# Altium PCB PCB_ATMEGA.PcbDoc
Units mil, origin at the board's own origin, x right, y up, seen from the top; angles counter-clockwise.
Board outline 3993.11 x 2102.36 mil, 2 copper layers (Top Layer, Bottom Layer), stack 87.008 mil thick; 71 components, 111 nets, 369 pads, 51 vias.
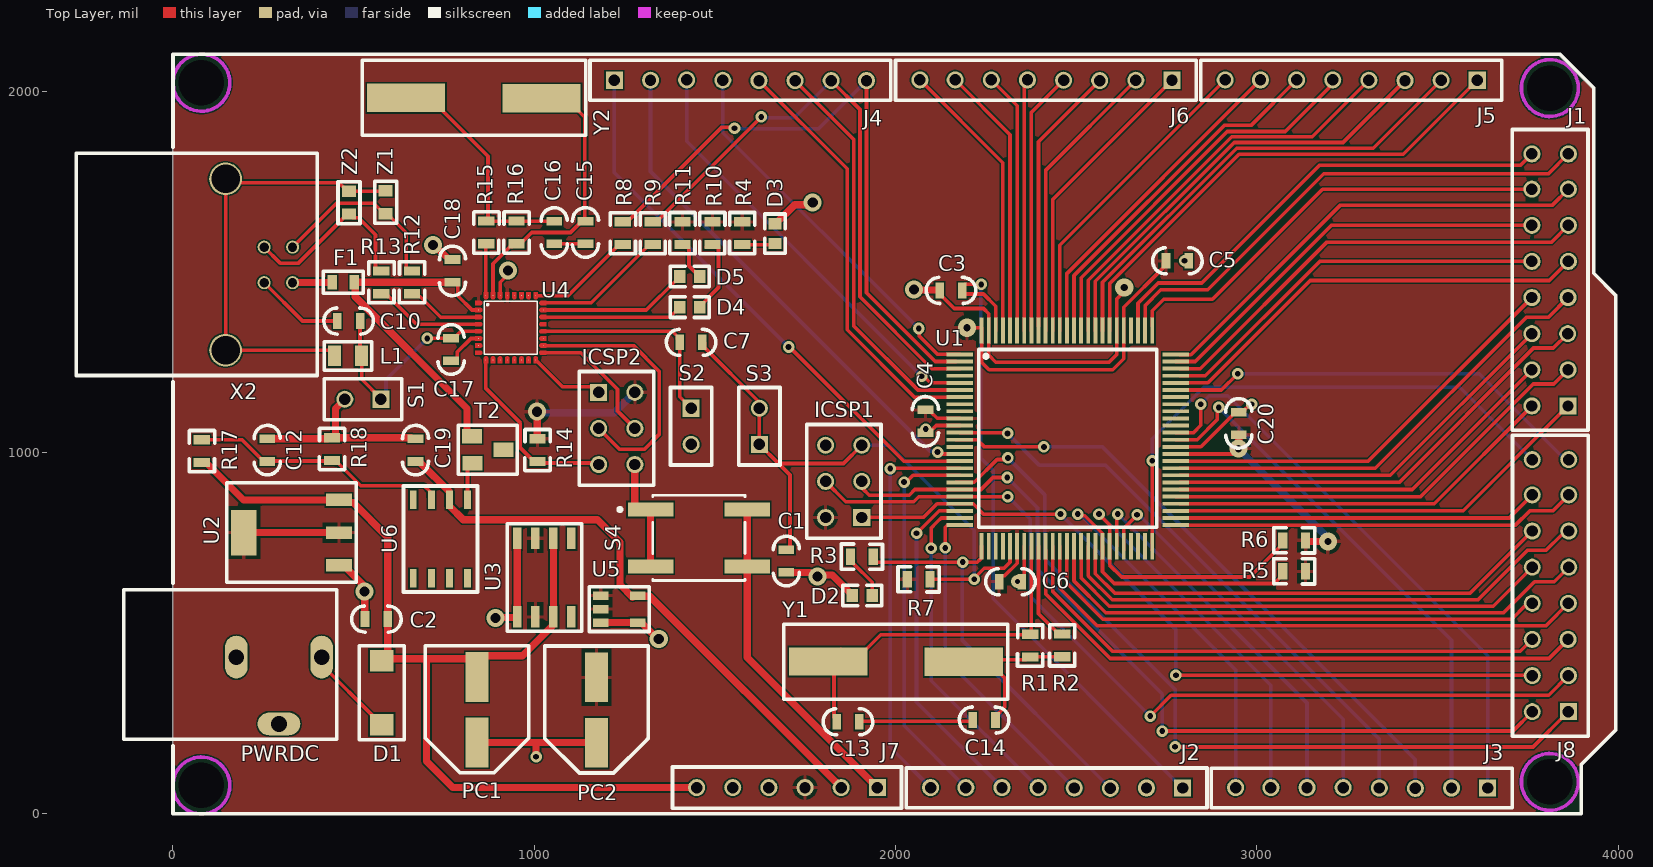
[diagram p0: Top Layer view]
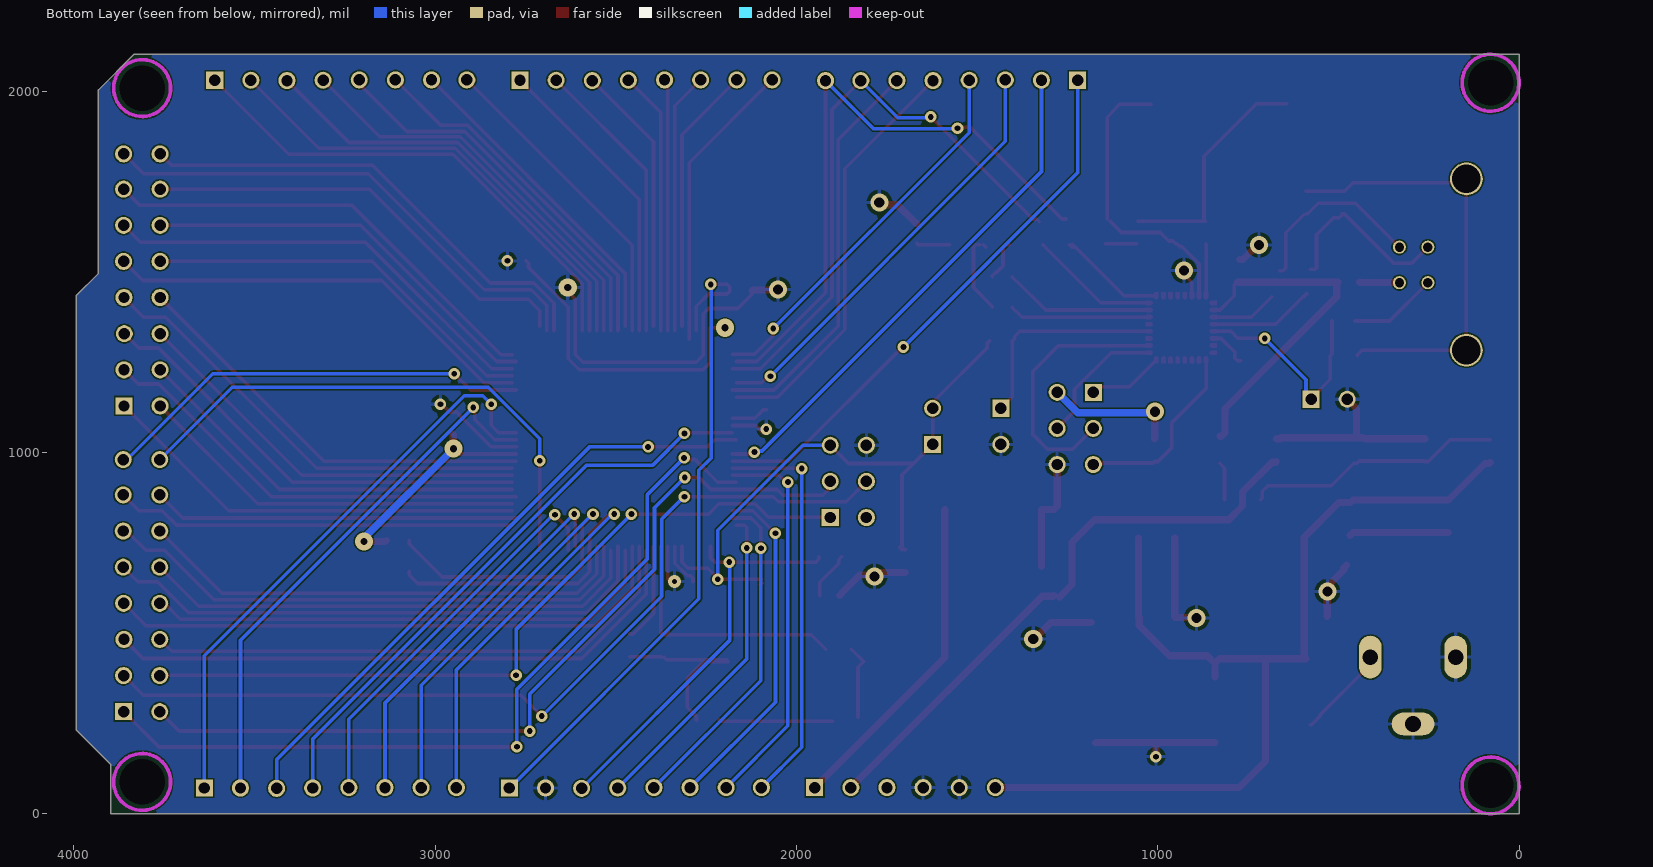
[diagram p1: Bottom Layer view, seen from below]

## Layer stack, top to bottom
Top Solder: solder mask 3.937, Solder Resist, Dk 3.5
Top Layer: signal copper 13.7795
Dielectric 1: dielectric 59.4488, FR-4, Dk 4.8
Bottom Layer: signal copper 13.7795
Bottom Solder: solder mask 3.937, Solder Resist, Dk 3.5

## Board outline
0,0 0,2102.36 3833.66,2102.36 3932.09,2003.94 3932.09,1496.06 3993.11,1435.04 3993.11,232.28 3897.64,136.81 3897.64,0

## Design rules (kind name [scope] priority, off if disabled: settings)
Clearance Clearance_1 [All] p1: gap=3.94 ignorepadtopadclearanceinfootprint=TRUE
Clearance [All] p2 off: gap=10 ignorepadtopadclearanceinfootprint=FALSE
ComponentClearance ComponentClearance_1 [All] p1: gap=10 collisioncheckmode=3 verticalgap=10 showdistances=FALSE
ComponentClearance [All] p2 off: gap=7.87 collisioncheckmode=3 verticalgap=7.87 showdistances=FALSE
HoleSize HoleSize_1 [All] p1: absolutevalues=TRUE maxlimit=157.48 minlimit=1 maxpercent=80.000 minpercent=20.000
HoleSize [All] p2 off: absolutevalues=TRUE maxlimit=100 minlimit=1 maxpercent=80.000 minpercent=20.000
HoleToHoleClearance HoleToHoleClearance_1 [All] p1: gap=7.87 allowstackedmicrovias=TRUE
HoleToHoleClearance [All] p2 off: gap=10 allowstackedmicrovias=TRUE
MinimumSolderMaskSliver MinimumSolderMaskSliver_1 [All] p1: minsoldermaskwidth=3.94
MinimumSolderMaskSliver [All] p2 off: minsoldermaskwidth=10
PolygonConnect [All] p1: connectstyle=Relief reliefconductorwidth=10 reliefentries=4 polygonreliefangle="90 Angle" airgapwidth=10
RoutingVias RoutingVias_1 [All] p1: holewidth=28 width=50 viastyle="Through Hole" minholewidth=16 minwidth=32 maxholewidth=28 maxwidth=50
RoutingVias [All] p2 off: holewidth=16 width=32 viastyle="Through Hole" minholewidth=16 minwidth=32 maxholewidth=16 maxwidth=32
SilkToSilkClearance SilkToSilkClearance_1 [All] p1: silktosilkclearance=7.87
SilkToSilkClearance [All] p2 off: silktosilkclearance=10
SilkToSolderMaskClearance SilkToSolderMaskClearance_1 [IsPad] p1: minsilkscreentomaskgap=3.94 clearancetoexposedcopper=TRUE
SilkToSolderMaskClearance [IsPad] p2 off: minsilkscreentomaskgap=10 clearancetoexposedcopper=TRUE
SolderMaskExpansion SolderMaskExpansion_1 [All] p1: expansion=1.57 istentingtop=FALSE
SolderMaskExpansion [All] p2 off: expansion=4 istentingtop=FALSE
SupplyNets "Schematic Supply Nets_4" [InNet('GND')] p1: voltage=0.000
SupplyNets "Schematic Supply Nets_3" [InNet('+5V')] p2: voltage=0.000
SupplyNets "Schematic Supply Nets_2" [InNet('VIN')] p3: voltage=0.000
SupplyNets "Schematic Supply Nets_1" [InNet('USBVCC')] p4: voltage=0.000
SupplyNets "Schematic Supply Nets" [InNet('+3.3V')] p5: voltage=0.000
Width [All] p1: maxlimit=30 minlimit=10 preferedwidth=20 minimp=50.000000 maximp=50.000000 favimp=50.000000
24 further rules are at their usual default settings.

## Classes and differential pairs
component class SCH2: C7 C10 C12 C15 C16 C17 C18 C19 D4 D5 F1 ICSP2 L1 R8 R9 R10 R11 R12 R13 R14 R15 R16 R17 R18 S1 S2 S3 T2 U4 U5 U6 X2 Y2 Z1 Z2
component class SCH1: C1 C2 C3 C4 C5 C6 C13 C14 C20 D1 D2 D3 ICSP1 J1 J2 J3 J4 J5 J6 J7 J8 PC1 PC2 PWRDC R1 R2 R3 R4 R5 R6 R7 S4 U1 U2 U3 Y1

## Components (designator, comment, footprint, x,y, rotation, side; value= is the part's Value field where it differs from the comment)
C1 "uF" CAPACITOR 1697.83,699.8 r90 top
C2 "uF" CAPACITOR 562.99,539.37 r0 top
C3 "100nF" CAPACITOR 2153.54,1448.82 r0 top
C4 "100nF" CAPACITOR 2082.68,1086.61 r90 top
C5 "100nF" CAPACITOR 2780,1530.83 r180 top
C6 "100nF" CAPACITOR 2317.91,642.72 r180 top
C7 "uF" CAPACITOR 1434.05,1305.12 r0 top
C10 "uF" CAPACITOR 486.22,1364.17 r0 top
C12 "uF" CAPACITOR 260.83,1006.89 r270 top
C13 "100nF" CAPACITOR 1868.11,254.92 r180 top
C14 "100nF" CAPACITOR 2245.08,259.84 r0 top
C15 "uF" CAPACITOR 1141.73,1609.25 r90 top
C16 "uF" CAPACITOR 1055.12,1609.25 r90 top
C17 "uF" CAPACITOR 769.68,1285.43 r270 top
C18 "uF" CAPACITOR 773.62,1502.95 r90 top
C19 "uF" CAPACITOR 671.26,1006.89 r270 top
C20 "100nF" CAPACITOR 2950,1080.83 r270 top
D1 "M7" "DIODE M7" 577.76,335.63 r90 top
D2 "C" LED 1907.48,604.33 r180 top
D3 "C" LED 1666.34,1606.3 r90 top
D4 "C" LED 1430.12,1402.56 r180 top
D5 "C" LED 1430.12,1487.2 r180 top
F1 "K" FUSE 471.46,1471.46 r0 top
ICSP1 "ICSP" ICSP 1856.3,920.28 r90 top
ICSP2 "ICSP2" ICSP 1228.35,1066.93 r270 top
J1 "XIOH" "16 PIN HEADER" 3811.71,1477.95 r90 top
J2 "PWMH" "FEMALE HEADER" 2445.67,71.85 r180 top
J3 "COMMUNCATION" "FEMALE HEADER" 3290,71.69 r180 top
J4 "PWML" "FEMALE HEADER" 1570.67,2030.51 r0 top
J5 "ADCH" "FEMALE HEADER" 3261.18,2030.63 r180 top
J6 "ADCL" "FEMALE HEADER" 2416.18,2030.63 r180 top
J7 "POWER" "6 PIN FH" 1699.41,72.83 r180 top
J8 "XIOH" "16 PIN HEADER" 3812.7,631.69 r90 top
L1 "BLM21" BLM21BD102SN1D 484.74,1267.76 r0 top
PC1 "uF" "POLARIZED CAP" 841.54,288.39 r270 top
PC2 "uF" "POLARIZED CAP" 1172.24,287.4 r270 top
PWRDC "BARREL JACK" "BARREL JACK" 293.39,341.54 r0 top locked
R1 "K" RESISTOR 2373.03,465.55 r90 top
R2 "K" RESISTOR 2461.61,466.54 r90 top
R3 "K" RESISTOR 1906.5,711.61 r0 top
R4 "K" RESISTOR 1575.79,1607.28 r90 top
R5 "K" RESISTOR 3103.35,671.26 r0 top
R6 "K" RESISTOR 3103.35,756.89 r0 top
R7 "K" RESISTOR 2063.98,649.61 r180 top
R8 "K" RESISTOR 1245.08,1607.28 r270 top
R9 "K" RESISTOR 1327.76,1607.28 r270 top
R10 "K" RESISTOR 1493.11,1607.28 r90 top
R11 "K" RESISTOR 1410.43,1607.28 r90 top
R12 "K" RESISTOR 661.42,1471.46 r270 top
R13 "K" RESISTOR 576.77,1471.46 r270 top
R14 "K" RESISTOR 1008.86,1006.89 r270 top
R15 "K" RESISTOR 867.13,1609.25 r270 top
R16 "K" RESISTOR 950.79,1609.25 r270 top
R17 "K" RESISTOR 79.72,1003.94 r270 top
R18 "K" RESISTOR 439.96,1009.84 r270 top
S1 "GROUND" "2 PIN HEADER" 525.59,1147.64 r180 top
S2 "UBOOT" "2 PIN HEADER" 1434.05,1072.83 r270 top
S3 "RESET-EN" "2 PIN HEADER" 1623.03,1072.83 r90 top
S4 "EVQ-Q2Y03W" PNSC-EVQQ2_V 1455.71,763.78 r0 top
T2 "FDN340P" FDN340P 871.06,1007.87 r270 top
U1 "ATMEGA2560-16AU" ATMEGA2560-16AU 2476.38,1039.37 r0 top
U2 "MC33269ST-5.0T3" MC33269ST-3.3T3 327.76,778.54 r90 top
U3 "MC33269D-5.0" MC33269D-5.0 952.95,545.47 r0 top
U4 "ATMEGA8U2-MU" ATMEGA8U2-MU 935.04,1345.47 r270 top
U5 "LP2985-33DBVR" LP2985-33DBVR 1235.24,566.93 r0 top
U6 "LM358D" LM258D 740.16,760.83 r180 top
X2 "USB" UJ2-BH-1-TH 238.39,1520.47 r270 top locked
Y1 "MHZ" ECS-160-20-5PX-TR 2000.98,421.26 r180 top
Y2 "MHZ" ECS-160-20-5PX-TR 832.68,1981.3 r0 top
Z1 "PGB1010604" PGB1010603MR 588.58,1692.91 r180 top
Z2 "PGB1010604" PGB1010603MR 487.2,1691.93 r180 top

## Footprints (in the part's own frame and the unit in brackets; to place one, negate y for a bottom-side part, rotate by r counter-clockwise, add the part's x,y. Pads: shape width x height; smd on the part's side, far side on the other; paste and mask are expansions set on the pad)
"2 PIN HEADER" [mm]
  rect 1.2x1.2 hole 0.8: 1(-1.27,0)
  round 1.2 hole 0.8: 2(1.27,0)
  silkscreen extent -2.73,-1.45 2.73,1.45, body extent -2.54,-1.27 2.54,1.27, height 8.74
"6 PIN FH" [mm] "PPTC061LFBN-RC"
  rect 1.2x1.2 hole 0.8: 1(-6.35,0)
  round 1.2 hole 0.8: 2(-3.81,0) 3(-1.27,0) 4(1.27,0) 5(3.81,0) 6(6.35,0)
  silkscreen extent -8.05,-1.45 8.05,1.45, body extent -7.87,-1.27 7.87,1.27, height 8.51
"16 PIN HEADER" [mm] "PPTC161LFBN-RC"
  rect 1.2x1.2 hole 0.8: 1(-8.86,-1.257)
  round 1.2 hole 0.8: 2(-8.86,1.283) 3(-6.32,-1.257) 4(-6.32,1.283) 5(-3.78,-1.232) 6(-3.78,1.283) 7(-1.24,-1.257) 8(-1.24,1.283) 9(1.3,-1.282) 10(1.3,1.283) 11(3.84,-1.282) 12(3.84,1.283) 13(6.38,-1.282) 14(6.38,1.283) 15(8.86,-1.282) 16(8.86,1.283)
  silkscreen extent -10.58,-2.66 10.57,2.67, body extent -10.41,-2.51 10.41,2.51, height 8.25
ATMEGA8U2-MU [mil]
  round 1 smd mask+1.57: 1(-89.37,-68.9) 2(-89.37,-49.21) 3(-89.37,-29.53) 4(-89.37,-9.84) 5(-89.37,9.84) 6(-89.37,29.53) 7(-89.37,49.21) 8(-89.37,68.9) 9(-68.9,89.37) 10(-49.21,89.37) 11(-29.53,89.37) 12(-9.84,89.37) 13(9.84,89.37) 14(29.53,89.37) 15(49.21,89.37) 16(68.9,89.37) 17(89.37,68.9) 18(89.37,49.21) 19(89.37,29.53) 20(89.37,9.84) 21(89.37,-9.84) 22(89.37,-29.53) 23(89.37,-49.21) 24(89.37,-68.9) 25(68.9,-89.37) 26(49.21,-89.37) 27(29.53,-89.37) 28(9.84,-89.37) 29(-9.84,-89.37) 30(-29.53,-89.37) 31(-49.21,-89.37) 32(-68.9,-89.37)
  Top Layer region: 74.8,83.46 73.58,81.12 71.48,79.51 68.9,78.93 66.31,79.51 64.21,81.12 62.99,83.46 62.99,83.46 62.99,98.62 74.8,98.62
  Top Layer region: 55.12,83.46 53.9,81.12 51.8,79.51 49.21,78.93 46.63,79.51 44.53,81.12 43.31,83.46 43.31,83.46 43.31,98.62 55.12,98.62
  Top Layer region: 35.43,83.46 34.21,81.12 32.11,79.51 29.53,78.93 26.94,79.51 24.84,81.12 23.62,83.46 23.62,83.46 23.62,98.62 35.43,98.62
  Top Layer region: 15.75,83.46 14.53,81.12 12.43,79.51 9.84,78.93 7.26,79.51 5.16,81.12 3.94,83.46 3.94,83.46 3.94,98.62 15.75,98.62
  Top Layer region: -3.94,83.46 -5.16,81.12 -7.26,79.51 -9.84,78.93 -12.43,79.51 -14.53,81.12 -15.75,83.46 -15.75,83.46 -15.75,98.62 -3.94,98.62
  Top Layer region: -23.62,83.46 -24.84,81.12 -26.94,79.51 -29.53,78.93 -32.11,79.51 -34.21,81.12 -35.43,83.46 -35.43,83.46 -35.43,98.62 -23.62,98.62
  Top Layer region: -43.31,83.46 -44.53,81.12 -46.63,79.51 -49.21,78.93 -51.8,79.51 -53.9,81.12 -55.12,83.46 -55.12,83.46 -55.12,98.62 -43.31,98.62
  Top Layer region: -62.99,83.46 -64.21,81.12 -66.31,79.51 -68.9,78.93 -71.48,79.51 -73.58,81.12 -74.8,83.46 -74.8,83.46 -74.8,98.62 -62.99,98.62
  Top Layer region: -74.8,-83.46 -73.58,-81.12 -71.48,-79.51 -68.9,-78.93 -66.31,-79.51 -64.21,-81.12 -62.99,-83.46 -62.99,-83.46 -62.99,-98.62 -74.8,-98.62
  Top Layer region: 62.99,-83.46 64.21,-81.12 66.31,-79.51 68.9,-78.93 71.48,-79.51 73.58,-81.12 74.8,-83.46 74.8,-83.46 74.8,-98.62 62.99,-98.62
  Top Layer region: 43.31,-83.46 44.53,-81.12 46.63,-79.51 49.21,-78.93 51.8,-79.51 53.9,-81.12 55.12,-83.46 55.12,-83.46 55.12,-98.62 43.31,-98.62
  Top Layer region: -55.12,-83.46 -53.9,-81.12 -51.8,-79.51 -49.21,-78.93 -46.63,-79.51 -44.53,-81.12 -43.31,-83.46 -43.31,-83.46 -43.31,-98.62 -55.12,-98.62
  Top Layer region: -35.43,-83.46 -34.21,-81.12 -32.11,-79.51 -29.53,-78.93 -26.94,-79.51 -24.84,-81.12 -23.62,-83.46 -23.62,-83.46 -23.62,-98.62 -35.43,-98.62
  Top Layer region: -15.75,-83.46 -14.53,-81.12 -12.43,-79.51 -9.84,-78.93 -7.26,-79.51 -5.16,-81.12 -3.94,-83.46 -3.94,-83.46 -3.94,-98.62 -15.75,-98.62
  Top Layer region: 3.94,-83.46 5.16,-81.12 7.26,-79.51 9.84,-78.93 12.43,-79.51 14.53,-81.12 15.75,-83.46 15.75,-83.46 15.75,-98.62 3.94,-98.62
  Top Layer region: 23.62,-83.46 24.84,-81.12 26.94,-79.51 29.53,-78.93 32.11,-79.51 34.21,-81.12 35.43,-83.46 35.43,-83.46 35.43,-98.62 23.62,-98.62
  Top Layer region: 83.46,-74.8 81.12,-73.58 79.51,-71.48 78.93,-68.9 79.51,-66.31 81.12,-64.21 83.46,-62.99 83.46,-62.99 98.62,-62.99 98.62,-74.8
  Top Layer region: 83.46,62.99 81.12,64.21 79.51,66.31 78.93,68.9 79.51,71.48 81.12,73.58 83.46,74.8 83.46,74.8 98.62,74.8 98.62,62.99
  Top Layer region: 83.46,43.31 81.12,44.53 79.51,46.63 78.93,49.21 79.51,51.8 81.12,53.9 83.46,55.12 83.46,55.12 98.62,55.12 98.62,43.31
  Top Layer region: 83.46,-55.12 81.12,-53.9 79.51,-51.8 78.93,-49.21 79.51,-46.63 81.12,-44.53 83.46,-43.31 83.46,-43.31 98.62,-43.31 98.62,-55.12
  Top Layer region: 83.46,-35.43 81.12,-34.21 79.51,-32.11 78.93,-29.53 79.51,-26.94 81.12,-24.84 83.46,-23.62 83.46,-23.62 98.62,-23.62 98.62,-35.43
  Top Layer region: 83.46,-15.75 81.12,-14.53 79.51,-12.43 78.93,-9.84 79.51,-7.26 81.12,-5.16 83.46,-3.94 83.46,-3.94 98.62,-3.94 98.62,-15.75
  Top Layer region: 83.46,3.94 81.12,5.16 79.51,7.26 78.93,9.84 79.51,12.43 81.12,14.53 83.46,15.75 83.46,15.75 98.62,15.75 98.62,3.94
  Top Layer region: 83.46,23.62 81.12,24.84 79.51,26.94 78.93,29.53 79.51,32.11 81.12,34.21 83.46,35.43 83.46,35.43 98.62,35.43 98.62,23.62
  Top Layer region: -83.46,-23.62 -81.12,-24.84 -79.51,-26.94 -78.93,-29.53 -79.51,-32.11 -81.12,-34.21 -83.46,-35.43 -83.46,-35.43 -98.62,-35.43 -98.62,-23.62
  Top Layer region: -83.46,-3.94 -81.12,-5.16 -79.51,-7.26 -78.93,-9.84 -79.51,-12.43 -81.12,-14.53 -83.46,-15.75 -83.46,-15.75 -98.62,-15.75 -98.62,-3.94
  Top Layer region: -83.46,15.75 -81.12,14.53 -79.51,12.43 -78.93,9.84 -79.51,7.26 -81.12,5.16 -83.46,3.94 -83.46,3.94 -98.62,3.94 -98.62,15.75
  Top Layer region: -83.46,35.43 -81.12,34.21 -79.51,32.11 -78.93,29.53 -79.51,26.94 -81.12,24.84 -83.46,23.62 -83.46,23.62 -98.62,23.62 -98.62,35.43
  Top Layer region: -83.46,55.12 -81.12,53.9 -79.51,51.8 -78.93,49.21 -79.51,46.63 -81.12,44.53 -83.46,43.31 -83.46,43.31 -98.62,43.31 -98.62,55.12
  Top Layer region: -83.46,-43.31 -81.12,-44.53 -79.51,-46.63 -78.93,-49.21 -79.51,-51.8 -81.12,-53.9 -83.46,-55.12 -83.46,-55.12 -98.62,-55.12 -98.62,-43.31
  Top Layer region: -83.46,-62.99 -81.12,-64.21 -79.51,-66.31 -78.93,-68.9 -79.51,-71.48 -81.12,-73.58 -83.46,-74.8 -83.46,-74.8 -98.62,-74.8 -98.62,-62.99
  Top Layer region: -83.46,74.8 -81.12,73.58 -79.51,71.48 -78.93,68.9 -79.51,66.31 -81.12,64.21 -83.46,62.99 -83.46,62.99 -98.62,62.99 -98.62,74.8
  silkscreen extent -73,-73 73,73, body extent -99,-99 99,99, height 39
ATMEGA2560-16AU [mm]
  rect 1.85x0.27 smd mask+0.05: 1(-7.588,5.905) 2(-7.588,5.405) 3(-7.588,4.905) 4(-7.588,4.405) 5(-7.588,3.905) 6(-7.588,3.405) 7(-7.588,2.905) 8(-7.588,2.405) 9(-7.588,1.905) 10(-7.588,1.405) 11(-7.588,0.905) 12(-7.588,0.405) 13(-7.588,-0.095) 14(-7.588,-0.595) 15(-7.588,-1.095) 16(-7.588,-1.595) 17(-7.588,-2.095) 18(-7.588,-2.595) 19(-7.588,-3.095) 20(-7.588,-3.595) 21(-7.588,-4.095) 22(-7.588,-4.595) 23(-7.588,-5.095) 24(-7.588,-5.595) 25(-7.588,-6.095) 51(7.588,-6.095) 52(7.588,-5.595) 53(7.588,-5.095) 54(7.588,-4.595) 55(7.588,-4.095) 56(7.588,-3.595) 57(7.588,-3.095) 58(7.588,-2.595) 59(7.588,-2.095) 60(7.588,-1.595) 61(7.588,-1.095) 62(7.588,-0.595) 63(7.588,-0.095) 64(7.588,0.405) 65(7.588,0.905) 66(7.588,1.405) 67(7.588,1.905) 68(7.588,2.405) 69(7.588,2.905) 70(7.588,3.405) 71(7.588,3.905) 72(7.588,4.405) 73(7.588,4.905) 74(7.588,5.405) 75(7.588,5.886)
  rect 0.27x1.85 smd mask+0.05: 26(-6.055,-7.588) 27(-5.555,-7.588) 28(-5.055,-7.588) 29(-4.555,-7.588) 30(-4.055,-7.588) 31(-3.555,-7.588) 32(-3.055,-7.588) 33(-2.555,-7.588) 34(-2.055,-7.588) 35(-1.555,-7.588) 36(-1.055,-7.588) 37(-0.555,-7.588) 38(-0.055,-7.588) 39(0.445,-7.588) 40(0.945,-7.588) 41(1.445,-7.588) 42(1.945,-7.588) 43(2.445,-7.588) 44(2.945,-7.588) 45(3.445,-7.588) 46(3.945,-7.588) 47(4.445,-7.588) 48(4.945,-7.588) 49(5.445,-7.588) 50(5.945,-7.588) 76(5.945,7.588) 77(5.445,7.588) 78(4.945,7.588) 79(4.445,7.588) 80(3.945,7.588) 81(3.445,7.588) 82(2.945,7.588) 83(2.445,7.588) 84(1.945,7.588) 85(1.445,7.588) 86(0.945,7.588) 87(0.445,7.588) 88(-0.055,7.588) 89(-0.555,7.588) 90(-1.055,7.588) 91(-1.555,7.588) 92(-2.055,7.588) 93(-2.555,7.588) 94(-3.055,7.588) 95(-3.555,7.588) 96(-4.055,7.588) 97(-4.555,7.588) 98(-5.055,7.588) 99(-5.555,7.588) 100(-6.055,7.588)
  silkscreen extent -6.25,-6.25 6.25,6.25, body extent -8.05,-8.08 7.95,7.92, height 1.2
"BARREL JACK" [mm] "PJ-102A"
  oval 1.6x3 hole 1.1: 1(-3,2.35) 2(3,2.35)
  oval 3x1.6 hole 1.1: 3(0,-2.35)
  silkscreen extent -10.92,-3.42 4.08,7.07, body extent -10.75,-2.5 3.65,6.9, height 11
BLM21BD102SN1D [mm]
  rect 0.9x1.45 smd: 1(-0.95,0) 2(0.95,0)
  silkscreen extent -1.68,-1 1.68,1, body extent -1,-0.63 1,0.63, height 1.05
CAPACITOR [mm]
  rect 0.6x1.1 smd: 1(-0.8,0) 2(0.8,0)
  silkscreen extent -1.74,-0.92 1.74,0.92, body extent -0.8,-0.41 0.8,0.41, height 0.89
"DIODE M7" [mm]
  rect 1.52x1.68 smd: 1(-2.25,0) 2(2.25,0)
  silkscreen extent -3.3,-1.58 3.3,1.58, body extent -2.6,-1.4 2.6,1.4, height 2.26
ECS-160-20-5PX-TR [mm] "CRYSTAL 16.0000MHZ 20PF SMD"
  rect 5.5x2 smd: 1(-4.762,0.013) 2(4.763,-0.012)
  silkscreen extent -7.85,-2.63 7.88,2.65, body extent -6.6,-2.4 6.6,2.4, height 3.2
FDN340P [mm] "MOSFET P-CH 20V 2A SUPERSOT3"
  rect 1x1.4 smd: 1(-0.95,-1.1) 2(0.95,-1.075) ""(0,1.1)
  silkscreen extent -1.73,-2.07 1.73,2.07, body extent -1.48,-1.25 1.44,1.25, height 1.12
"FEMALE HEADER" [mm]
  rect 1.2x1.2 hole 0.8: 1(-8.86,0)
  round 1.2 hole 0.8: 2(-6.32,0) 3(-3.78,0.025) 4(-1.24,0) 5(1.3,-0.025) 6(3.84,-0.025) 7(6.38,-0.025) 8(8.86,-0.025)
  silkscreen extent -10.58,-1.4 10.58,1.4, body extent -10.41,-1.25 10.41,1.25, height 8.25
FUSE [mm] "ERB-RE0R50V"
  rect 0.65x1 smd: 1(-0.775,0) 2(0.775,0)
  silkscreen extent -1.4,-0.77 1.4,0.77, body extent -0.8,-0.4 0.8,0.4, height 0.64
ICSP [mm]
  rect 1.2x1.2 hole 0.8: 1(-2.54,-1.27)
  round 1.2 hole 0.8: 2(-2.54,1.27) 3(0,-1.27) 4(0,1.27) 5(2.54,-1.27) 6(2.54,1.27)
  silkscreen extent -4,-2.63 4,2.6, body extent -3.81,-2.41 3.81,2.41, height 8.38
LED [mm] "150060RS75000"
  rect 0.8x0.9 smd: 1(-0.7,0) 2(0.7,0)
  silkscreen extent -1.37,-0.72 1.38,0.72, body extent -0.8,-0.4 0.8,0.4, height 0.7
LM258D [mm]
  rect 0.48x1.3 smd: 1(-1.905,-2.775) 2(-0.635,-2.775) 3(0.635,-2.775) 4(1.905,-2.775) 5(1.905,2.775) 6(0.635,2.775) 7(-0.635,2.775) 8(-1.905,2.775)
  silkscreen extent -2.61,-3.72 2.6,3.73, body extent -2.46,-3 2.44,3, height 1.75
LP2985-33DBVR [mm] "IC REG LINEAR 3.3V 150MA SOT23-5"
  rect 1.1x0.6 smd: 1(-1.3,0.95) 2(-1.3,0) 3(-1.3,-0.95) 4(1.3,-0.95) 5(1.3,0.95)
  silkscreen extent -2.1,-1.58 2.1,1.58, body extent -1.4,-1.45 1.4,1.45, height 1.45
MC33269D-5.0 [mm] "IC REG LINEAR 5V 800MA 8-SOIC"
  rect 0.6x1.52 smd: 1(0,0) 1(0,5.52) 2(1.27,0) 2(1.27,5.52) 3(2.54,0) 3(2.54,5.52) 4(3.81,0) 4(3.81,5.52)
  silkscreen extent -0.7,-1.02 4.52,6.55, body extent -0.55,-0.34 4.36,5.86, height 1.76
MC33269ST-3.3T3 [mm] "IC REG LINEAR 3.3V 800MA SOT-223"
  rect 0.89x1.8 smd: 1(-2.3,-3.35) 2(0,-3.35) 3(2.3,-3.35)
  rect 3.2x1.8 smd: 4(0,3.35)
  silkscreen extent -3.5,-4.55 3.5,4.55, body extent -3.34,-3.59 3.34,3.7, height 1.73
PGB1010603MR [mm] "TVS DIODE 24VWM 150VC 603"
  rect 1x0.8 smd: 1(0,-0.8) 2(0,0.8)
  silkscreen extent -0.77,-1.48 0.77,1.48, body extent -0.42,-0.83 0.42,0.83, height 0.32
PNSC-EVQQ2_V [mm] "SMD, 4-Leads, Body 6.5x6mm"
  rect 3.2x1 smd: 1(-3.4,2) 2(-3.4,-2) 3(3.4,2) 4(3.4,-2)
  silkscreen extent -5.67,-3 3.25,3, body extent -3.3,-3 3.3,3, height 3.1
"POLARIZED CAP" [mm] "865080543009"
  rect 3.5x1.6 smd: 1(-2.3,0) 2(2.3,0)
  silkscreen extent -4.5,-3.65 4.42,3.62, body extent -3.65,-3.3 3.65,3.3, height 5.35
RESISTOR [mm]
  rect 0.65x1.15 smd: 1(-0.8,0) 2(0.8,0)
  silkscreen extent -1.45,-0.88 1.45,0.9, body extent -0.85,-0.47 0.85,0.47, height 0.56
UJ2-BH-1-TH [mm] "CONN RCPT USB2.0 TYPEB 4POS R/A"
  round 0.92 hole 0.65: 1(1.275,2.355) 2(-1.225,2.355) 3(-1.225,0.355) 4(1.275,0.355)
  round 2.3 hole 2: 5(-6.02,-2.355) 6(6.02,-2.355)
  silkscreen extent -7.83,-12.85 7.8,4.08, body extent -7.5,-12.6 7.5,3.85, height 10.3

## Part data
C1 C2 C3 C4 C5 C6 C7 C10 C12 C13 C14 C15 C16 C17 C18 C19 C20: library part CAPACITOR
D1: library part DIODE
D2 D3 D4 D5: library part LED
F1 L1 R1 R2 R3 R4 R5 R6 R7 R8 R9 R10 R11 R12 R13 R14 R15 R16 R17 R18: library part RESISTOR
ICSP2: library part ICSP
J2 J3 J4 J5 J6: library part "HEADER PINS"
PC1 PC2: library part "POLARIZED CAP"
S1 S2 S3: library part PUSH
S4: library part CMP-2000-06232-1, "Light Touch Switche, 3.5 N Force, Height 3.1 mm, -40 to 85 degC, 4-Pin SMD, RoHS, Tape and Reel", Actuator / Cap Colour=White, Contact Current DC Max=20mA, Contact Resistance Max=100mohm, Contact Voltage AC Max=250V, Contact Voltage DC Max=15V, Manufacturer=Panasonic, Operating Force=3.5N, Operating Temperature Max=85°C, Operating Temperature Min=-40°C, Package Description="4-Pin Surface Mount Device, Body 6.5 x 6 mm", Package Reference=EVQQ2, Actuation Type=Top, Body Depth=6mm, Body Width=6.5mm, ComponentLink1Description="New link", Contact Configuration=SPST-NO, Contact Current Max=20mA, Contact Current Rating=20mA, Contact Voltage DC Nom=15V, Datasheet URL=http://download.siliconexpert.com/pdfs/2014/10/4/5/54/9/232/pns_/manual/8atk0000ce28.pdf, Datasheet Version=09/2014, Dielectric Strength VAC=250V, External Depth=1.8mm, External Length / Height=3.1mm, External Width=6.5mm, Height=3.1mm, Manufacturer URL=http://www.panasonic.com/, Mounting Technology=SurfaceMount, No. of Mechanical Operations=100000, No. of Poles=1, No. of Ways=1, Operating Force Min=3.5N, Series=EVQQ2, SVHC=NoSVHC(16-Dec-2013), Switch Operation=Off-On, Switch Terminals=Solder, Terminal Type=SMD
U6: library part "OP AMP"
Y1 Y2: library part XTAL
Z1 Z2: library part TRIODE

## Free pads (board coordinates)
  oval 41.34x25.59 hole 125.98 unplated: H2(3811.02,2008.86) H3(78.74,78.74)
  oval 25.59x41.34 hole 125.98 unplated: H3(78.74,2023.62)
  round 0 hole 125.98 unplated: H3(3811.02,88.58)

## Via types
v1: diameter 32, hole 16, Top Layer to Bottom Layer, 37 vias
v2: diameter 50, hole 28, Top Layer to Bottom Layer, 9 vias
v3: diameter 50, hole 20, Top Layer to Bottom Layer, 4 vias
v4: diameter 36, hole 14, Top Layer to Bottom Layer, 1 vias

## Nets (pads, with @x,y where several pads share a name; then routed paths per layer and width w, separated by ;. In a path a pad name is that pad's centre, name@x,y a point inside that pad or via, vN(x,y) a via of type N, cw(c..) or ccw(c..) an arc to the next point about the centre after c; other vN are vias at no path point)
+3.3V: C19.2 J7.2 U5.5 U6.2 | length 1631.2
  Top Layer w20: C19.2 673.07,973.58 682.91,973.58 765.16,891.34 765.16,851.97 803.15,813.98 1175.2,813.98 1237.2,751.97 1237.2,634.84 U5.5@1272.15,599.9 ; U5.5 1288.23,602.52 1319.72,602.52 J7.2
+5V: C4.2 C5.2 C6.2 C20.2 ICSP1.2 ICSP2.2 J7.3 PC2.1 R4.2 R5.2 R6.2 R7.2 R10.2 R11.2 R14.1 U1.10 U1.31 U1.61 U1.80 U1.100 U2.2 U2.4 U3.2 U4.4 U4.32 U5.1 U5.2 | length 2376.3
  Top Layer w10: C4.2 2092.52,1118.11 2099.33,1111.3 2099.33,1110.31 2114.98,1094.67 U1.10 ; v3(2197.83,1345.47) 2237.68,1345.47 2237.99,1345.16 2237.99,1250.2 2258.86,1229.33 2601.38,1229.33 2631.69,1259.65 U1.80 2631.69,1402.52 2741.69,1512.52 2741.69,1524.02 C5.2 ; C6.2 2286.42,652.56 2293.23,659.37 2301.69,659.37 2336.42,694.09 U1.31 ; U1.61 2934.59,996.24 v3(2949.18,1010.83)
  Top Layer w20: U2.4 U2.2 U2.2@467.17,771.02 ; v2(1007.87,1113.19) 1008.37,1112.7 1008.37,1038.88 R14.1 ; v3(2949.18,1010.83) 2949.59,1011.24 2949.59,1048.92 C20.2 ; R6.2 3134.84,756.65 3137.64,753.86 v3(3196.97,753.86)
  Bottom Layer w20: v2(1007.87,1113.19) 1010.83,1110.24 1221.65,1110.24 ICSP2.2 ; v3(2949.18,1010.83) v3@3193.14,766.86
  Bottom Layer w30: v3@3193.14,757.68 v3(3196.97,753.86)
GND: C1.1 C2.1 C3.1 C4.1 C5.1 C6.1 C12.1 C18.2 C19.1 C20.1 D2.2 D3.2 ICSP1.6 ICSP2.6 J2.2 J7.4 J7.5 PC1.2 PC2.2 PWRDC.1 PWRDC.3 R18.1 S1.2 S2.2 S4.1 S4.2 U1.11 U1.32 U1.62 U1.81 U1.99 U2.1 U3.1 U4.3 U5.3 U5.4 | length 3724.7
  Top Layer w10: U4.3 905.51,1471.46 927.17,1493.11 v2(927.17,1503.94) ; C4.1 2092.52,1055.12 2112.38,1074.98 U1.11 ; C3.1 2122.05,1438.98 2162.32,1398.7 2243.62,1398.7 2257.68,1384.65 U1.99 2257.68,1269.88 2277.56,1250 2590.6,1250 2612.01,1271.41 U1.81 2612.01,1425 2632.87,1445.87 v3(2632.87,1456.69) ; C6.1 2356.1,649.41 U1.32 ; U1.62@2774.78,1016.24 U1.62 2845.1,1015.93 2933.35,1104.17 2933.35,1105.51 2940.16,1112.32 2959.84,1112.32 2981.38,1133.86 v1(2985.24,1133.86)
  Top Layer w20: C12.1 427.16,1038.39 430.12,1041.34 R18.1 ; S1.2@474.61,1147.43 474.61,1147.1 449.8,1122.3 449.8,1044.13 447.01,1041.34 R18.1 ; U2.1@477.56,687.99 485.08,680.47 485.08,675.35 524.77,635.66 524.77,620.9 v2(530.51,615.16) 531,614.67 531,547.74 C2.1@531.5,547.24 ; C19.1 661.42,1038.39 658.46,1041.34 449.8,1041.34 446.68,1041.34 R18.1 ; v2(719.49,1574.8) 723.42,1574.8 763.78,1534.45 C18.2 ; PC1.2 1004.92,197.83 ; v2(892.72,542.32) 894.29,543.9 951.38,543.9 952.95,545.47 U3.1@952.95,762.79 ; v1(1004.92,158.46) 1004.92,197.83 ; PC2.2 1171.26,197.83 1004.92,197.83 ; U5.3 1296.26,529.53 1341.54,484.25 v2(1344.49,484.25) ; ICSP2.6 1278.35,852.2 1288.03,842.52 S4.1 S4.2 ; D3.2 1668.31,1633.86 1720.64,1686.19 1764.93,1686.19 v2(1770.67,1691.93) ; C1.1@1698.33,667.81 C1.1 1764.52,668.31 1775.35,657.48 v2(1783.46,657.48) 1787.21,661.23 1824.99,661.23 1874.17,612.05 1874.17,610.08 D2.2 ; v2@1781.99,662.89 v2@1782.48,662.4 ; v2(2051.18,1451.77) 2052.66,1450.3 2120.57,1450.3 C3.1
  other v1: 2083.66,1064.96 2800,1530.83
  other v4: 2337.6,643.7
NetC1_2: C1.2 C7.2 ICSP1.5 R7.1 S3.1 S3.2 U1.30 | length 1782.5
  Top Layer w10: C7.2@1465.55,1309.05 1472.36,1302.24 1472.36,1289.45 1617.26,1144.55 1617.26,1128.6 S3.2 S3.1 1675.98,969.88 ; C1.2 1700.87,731.3 1704.27,734.7 1707.68,738.11 1707.68,938.19 1675.98,969.88 ; C1.2@1707.68,731.3 1711.08,734.7 C1.2@1714.49,738.11 ; ICSP1.5 1855.91,969.88 1675.98,969.88 ; R7.1@2094.49,638.78 R7.1@2099.41,633.86 ; R7.1 v1(2217.52,649.61) 2217.52,652.56 2245.08,680.12 2300.2,680.12 2316.73,696.65 U1.30
  Bottom Layer w10: ICSP1.5 1982.68,1020.28 2217.52,785.43 v1(2217.52,649.61)
NetC3_2: C3.2 J2.1 U1.98 | length 1865.2
  Top Layer w10: v1(2237.2,1465.55) 2237.13,1465.47 2191.85,1465.47 2185.04,1458.66 2185.04,1445.79 2191.85,1438.98 2243.11,1438.98 2277.36,1404.72 U1.98
  Bottom Layer w10: v1(2237.2,1465.55) 2236.22,1464.57 2236.22,984.76 2270.02,950.96 2270.02,595.14 J2.1@2790.85,74.31
NetC7_1: C7.1 S2.1 U4.13 | length 592
  Top Layer w10: U4.13 1382.02,1335.63 1395.75,1321.9 1395.75,1315.87 1402.56,1309.05 1402.56,1154.33 S2.1
NetC10_1: C10.1 X2.4 | length 246.3
  Top Layer w10: X2.4 358.46,1364.17 C10.1
NetC10_2: C10.2 C17.1 L1.2 S1.1 U4.28 | length 625.3
  Top Layer w10: C10.2 517.72,1272.18 L1.2 522.15,1203.05 S1.1@574.61,1150.59 ; S1.1 S1.1@588.8,1134.43 ; v1(703.74,1315.94) 704.23,1316.44 769.19,1316.44 C17.1 779.53,1316.93 786.34,1323.74 786.34,1324.72 797.24,1335.63 U4.28
  Bottom Layer w10: S1.1@574.61,1150.59 589.68,1165.67 589.68,1201.89 v1(703.74,1315.94)
NetC12_2: C12.2 R17.1 R18.2 U6.3 | length 717
  Top Layer w10: R17.1 190.94,1035.43 250.98,975.39 C12.2 262.3,976.87 438.48,976.87 R18.2 447.76,970.55 457.6,970.55 519.69,908.46 694.88,908.46 710.71,892.64 710.71,874.53 U6.3
NetC13_1: C13.1 C14.1 | length 315.6
  Top Layer w10: C13.1@1899.61,255.91 2209.65,255.91 C14.1
NetC13_2: C13.2 R1.2 U1.33 Y1.2 | length 939
  Top Layer w10: C13.2@1829.72,267.67 1829.72,405.51 Y1.2 Y1.2@1847.85,456.12 ; Y1.2@1918.72,456.12 1958.66,496.06 R1.2@2366.14,496.06 ; R1.2@2355.39,504.84 2363.19,497.05 R1.2 2375.79,499.8 U1.33
NetC14_2: C14.2 R1.1 R2.1 Y1.1 | length 530.7
  Top Layer w10: C14.2 2276.57,269.68 2302.17,295.28 2302.17,375.98 2257.38,420.77 Y1.1 2194.88,427.16 2360.24,427.16 R1.1@2366.14,433.07 ; R1.1 2373.52,434.55 2461.12,434.55 R2.1
NetC15_1: C15.1 C16.1 | length 86.6
  Top Layer w10: C16.1@1058.07,1577.76 C15.1 C15.1@1144.68,1577.76
NetC15_2: C15.2 R16.2 U4.2 Y2.2 | length 804
  Top Layer w10: 885.83,1434.05 U4.2 885.83,1522.64 933.45,1570.26 938.37,1570.26 945.87,1577.76 R16.2 958.58,1585.55 969.41,1585.55 993.11,1609.25 1100.39,1609.25 C15.2@1131.89,1640.75 ; Y2.2@1018.21,1964.07 1105.81,1964.07 1123.44,1946.44 1123.44,1944.47 1139.76,1928.15 C15.2@1139.76,1645.35
NetC16_2: C16.2 R15.1 R16.1 Y2.1 | length 651.5
  Top Layer w10: Y2.1@643.21,1965.06 727.44,1965.06 872.05,1820.45 R15.1@872.05,1645.67 ; R15.1 872.05,1640.75 R16.1 C16.2
NetC17_2: C17.2 U4.27 | length 111.5
  Top Layer w10: C17.2 779.53,1253.94 786.34,1260.75 786.34,1277.48 824.8,1315.94 U4.27
NetD1_1: D1.1 PWRDC.2 | length 257.7
  Top Layer w10: PWRDC.2 421.64,423.92 421.64,403.17 549.68,275.12 549.68,271.97 574.61,247.05 D1.1
NetD2_1: D2.1 R3.1 | length 132.2
  Top Layer w10: R3.1 1882.8,703.82 1882.8,692.99 1935.04,640.75 D2.1
NetD3_1: D3.1 R4.1 | length 91.8
  Top Layer w10: R4.1 1663.39,1575.79 D3.1
NetD4_1: D4.1 R10.1 | length 218
  Top Layer w10: D4.1 1457.68,1404.53 1509.84,1456.69 1509.84,1567.99 1502.05,1575.79 R10.1 ; R10.1@1475.47,1567.99 R10.1@1483.27,1575.79
NetD4_2: D4.2 U4.11 | length 391.5
  Top Layer w10: 1023.62,1375 U4.11 1375,1375 1389.84,1389.84 1391.81,1389.84 1402.56,1400.59 D4.2
NetD5_1: D5.1 R11.1 | length 115.1
  Top Layer w10: R11.1 1420.27,1575.79 1428.07,1567.99 1428.07,1562.21 1428.15,1562.13 1428.15,1516.73 1444.96,1499.92 1446.93,1499.92 1457.68,1489.17 D5.1
NetD5_2: D5.2 U4.10 | length 417.6
  Top Layer w10: U4.10 1310.04,1394.68 1389.84,1474.49 1391.81,1474.49 1402.56,1485.24 D5.2
NetF1_1: F1.1 X2.1 | length 110.3
  Top Layer w20: X2.1 331.69,1470.87 440.35,1470.87 F1.1
NetICSP1_1: ICSP1.1 J8.4 U1.22 | length 2142.2
  Top Layer w10: ICSP1.1@1906.77,820.77 2077.22,820.77 2114.9,858.44 U1.22 2177.97,858.13 2214.7,858.13 2243.11,829.72 v1(2456.69,829.72) ; v1(2775.92,383.86) 2776.41,383.37 3761.71,383.37 J8.4
  Bottom Layer w10: v1(2456.69,829.72) 2775.92,510.5 v1(2775.92,383.86)
NetICSP1_3: ICSP1.3 J8.2 U1.20 | length 2376.8
  Top Layer w10: ICSP1.3@1902.83,920.77 1909.96,913.64 1909.96,899.09 1927.01,882.05 2037.56,882.05 2053.33,897.81 U1.20 2236.49,897.81 2269.78,931.1 v1(2309.05,931.1) ; v1(2738.19,229.33) 3708.66,229.33 J8.2
  Bottom Layer w10: v1(2309.05,931.1) 2392.72,847.44 2392.72,677.17 2738.19,331.69 v1(2738.19,229.33)
NetICSP1_4: ICSP1.4 J8.3 U1.21 | length 2508.1
  Top Layer w10: ICSP1.4 1862.4,864.17 2050.2,864.17 2064.15,878.13 U1.21 2310.85,878.13 v1@2311.02,877.95 ; v1(2704.72,270.67) 2762.51,328.45 3807.78,328.45 J8.3
  Bottom Layer w10: v1@2311.02,877.95 2373.03,815.94 2373.03,602.36 v1(2704.72,270.67)
  other v1: 2310.04,877.95
NetICSP2_1: ICSP2.1 U4.17 | length 211.6
  Top Layer w10: U4.17 1078.03,1182.01 1163.27,1182.01 1177.87,1167.4 ICSP2.1@1177.87,1166.44
NetICSP2_3: ICSP2.3 U4.15 | length 733.9
  Top Layer w10: U4.15 1274.61,1296.26 1345.47,1225.39 1345.47,1050.2 1304.13,1008.86 1236.42,1008.86 ICSP2.3
NetICSP2_4: ICSP2.4 U4.16 | length 377.5
  Top Layer w10: 1023.62,1276.57 1128.94,1276.57 1230.31,1175.2 1230.31,1114.94 ICSP2.4@1278.82,1066.44
NetICSP2_5: ICSP2.5 R14.2 U4.24 | length 515.3
  Top Layer w10: U4.24 866.14,1225.39 866.14,1177.16 961.61,1081.69 961.61,1012.79 999.02,975.39 R14.2 1013.09,971.16 1174.11,971.16 ICSP2.5@1176.04,973.09
NetJ1_1: J1.1 U1.53 | length 1195.1
  Top Layer w10: U1.53@2786.42,838.76 3570.85,838.76 3846.14,1114.05 J1.1
NetJ1_2: J1.2 U1.54 | length 1086.9
  Top Layer w10: U1.54@2786.42,858.44 3490.53,858.44 J1.2
NetJ1_3: J1.3 U1.55 | length 1231.5
  Top Layer w10: U1.55 3452.93,878.13 3764.76,1189.96 3822.05,1189.96 J1.3
NetJ1_4: J1.4 U1.56 | length 1112
  Top Layer w10: U1.56@2786.42,897.81 3429.9,897.81 J1.4
NetJ1_5: J1.5 U1.57 | length 1244.3
  Top Layer w10: U1.57@2786.42,917.5 3393.88,917.5 3765.75,1289.37 3820.47,1289.37 J1.5
NetJ1_6: J1.6 U1.58 | length 1137.2
  Top Layer w10: U1.58@2786.42,937.18 3369.27,937.18 J1.6
NetJ1_7: J1.7 U1.59 | length 1270.4
  Top Layer w10: U1.59@2786.42,956.87 3327.93,956.87 3746.06,1375 3807.09,1375 J1.7
NetJ1_8: J1.8 U1.60 | length 1173.6
  Top Layer w10: U1.60 3308.64,976.56 J1.8
NetJ1_9: J1.9 U1.71 | length 1215
  Top Layer w10: U1.71@2786.42,1193.09 2864.52,1193.09 3147.81,1476.38 3809.45,1476.38 J1.9
NetJ1_10: J1.10 U1.72 | length 1105.8
  Top Layer w10: U1.72@2786.42,1212.78 2857.46,1212.78 3173.82,1529.13 J1.10
NetJ1_11: J1.11 U1.73 | length 1240.1
  Top Layer w10: U1.73@2786.42,1232.46 2843.68,1232.46 3193.9,1582.68 3815.75,1582.68 J1.11
NetJ1_12: J1.12 U1.74 | length 1142.3
  Top Layer w10: U1.74 2829.55,1252.15 3206.54,1629.13 J1.12
NetJ1_13: J1.13 U1.75 | length 1265.5
  Top Layer w10: U1.75@2786.42,1271.08 2817.52,1271.08 3231.48,1685.04 3818.11,1685.04 J1.13
NetJ1_14: J1.14 U1.76 | length 1233.3
  Top Layer w10: U1.76@2710.43,1349.41 2710.43,1392.52 2742.13,1424.21 2876.97,1424.21 3181.89,1729.13 J1.14
NetJ1_15: J1.15 U1.77 | length 1414.4
  Top Layer w10: U1.77 2690.75,1407.28 2734.25,1450.79 2864.17,1450.79 3185.04,1771.65 3807.09,1771.65 J1.15
NetJ1_16: J1.16 U1.78 | length 1336.6
  Top Layer w10: U1.78 2671.06,1413.19 2727.36,1469.49 2847.44,1469.49 3173.23,1795.28 3729.72,1795.28 J1.16
NetJ2_3: J2.3 R3.2 U1.26 | length 1144
  Top Layer w10: R3.2 1937.99,704.65 1945.79,696.85 2226.43,696.85 2232.28,702.71 ; 2232.28,702.76 2237.68,708.15 2237.68,740.33 U1.26
  Bottom Layer w10: v1(2186.02,696.85) 2184.05,694.88 2184.05,481.3 J2.3
NetJ2_4: J2.4 U1.25 | length 900.2
  Top Layer w10: v1(2137.8,736.22) 2137.8,793.22 2143.65,799.07 2166.02,799.07 U1.25@2166.34,799.39
  Bottom Layer w10: v1(2137.8,736.22) 2137.8,428.54 J2.4
NetJ2_5: J2.5 U1.24 | length 931.9
  Top Layer w10: v1(2098.43,735.24) 2098.46,735.27 2098.46,791.45 2114.05,807.04 2126.08,819.07 U1.24
  Bottom Layer w10: v1(2098.43,735.24) 2098.43,368.9 J2.5
NetJ2_6: J2.6 U1.23 | length 946.9
  Top Layer w10: v1(2058.31,776.57) 2120.49,838.76 U1.23
  Bottom Layer w10: v1(2058.31,776.57) 2058.07,776.34 2058.07,309.25 J2.6
NetJ2_7: J2.7 U1.18 | length 1078.1
  Top Layer w10: v1(2023.62,918.31) 2029.58,918.31 2048.45,937.18 U1.18
  Bottom Layer w10: v1(2023.62,918.31) 2023.62,243.7 J2.7
NetJ2_8: J2.8 U1.17 | length 1122
  Top Layer w10: v1(1985.24,955.71) 1986.4,956.87 U1.17
  Bottom Layer w10: v1(1985.24,955.71) 1985.24,184.45 J2.8
NetJ3_1: J3.1 U1.64 | length 1604.6
  Top Layer w10: U1.64 2824.47,1055.3 2844.49,1075.31 v1(2844.49,1133.86)
  Bottom Layer w10: v1(2844.49,1133.86) 2868.11,1157.48 2919.29,1157.48 3638.82,437.95 J3.1
NetJ3_2: J3.2 U1.63 | length 1494
  Top Layer w10: U1.63 2834.78,1035.61 2890.64,1091.47 2890.64,1120.95 v1(2894.68,1125)
  Bottom Layer w10: v1(2894.68,1125) 3538.82,480.87 J3.2
NetJ3_3: J3.3 U1.13 | length 1718.5
  Top Layer w10: U1.13@2166.34,1035.61 U1.13 2226.2,1035.61 2246.06,1015.75 v1(2410.43,1015.75)
  Bottom Layer w10: v1(2410.43,1015.75) 2572.83,1015.75 3438.82,149.76 J3.3
NetJ3_4: J3.4 U1.12 | length 1648.1
  Top Layer w10: U1.12 2307.89,1055.3 v1(2310.04,1053.15)
  Bottom Layer w10: v1(2310.04,1053.15) 2398.62,964.57 2581.69,964.57 3338.82,207.44 J3.4
NetJ3_5: J3.5 U1.46 | length 1106.5
  Top Layer w10: U1.46@2631.69,729.33 U1.46 2631.69,790.16 v1@2668.31,826.77
  Bottom Layer w10: v1@2668.31,826.77 2674.21,826.77 3238.82,262.16 J3.5
  other v1: 2668.31,827.76
NetJ3_6: J3.6 U1.45 | length 1064.3
  Top Layer w10: U1.45 2612.01,825.59 v1@2616.14,829.72
  Bottom Layer w10: v1@2616.14,829.72 3138.82,307.05 J3.6
  other v1: 2615.16,829.72
NetJ3_7: J3.7 R6.1 U1.44 | length 1657.2
  Top Layer w10: v1(2562.99,829.72) 2592.32,800.39 2592.32,689.08 2625.73,655.67 2980.47,655.67 3064.05,739.25 3071.85,747.05 R6.1 ; J3.7@3033.05,78.45 J3.7
  Bottom Layer w10: v1(2562.99,829.72) 2564.78,829.72 3038.82,355.68 J3.7
NetJ3_8: J3.8 R5.1 U1.43 | length 1670.8
  Top Layer w10: v1(2503.94,829.72) 2508.15,825.51 2523.89,825.51 2572.32,777.09 U1.43@2572.32,740.65 ; U1.43 2572.64,670.47 2605.32,637.79 3048.23,637.79 3071.85,661.42 R5.1
  Bottom Layer w10: v1(2503.94,829.72) 2509.84,829.72 2941.18,398.39 J3.8
NetJ4_1: J4.1 U1.16 | length 1542.5
  Top Layer w10: v1(1703.74,1292.32) 1706.69,1292.32 2022.46,976.56 U1.16
  Bottom Layer w10: J4.1 1221.85,1774.21 v1(1703.74,1292.32)
NetJ4_2: J4.2 U1.15 | length 1432.2
  Top Layer w10: v1(2116.14,1001.49) 2122.09,1001.49 2127.35,996.24 U1.15
  Bottom Layer w10: J4.2 1321.85,1777.82 2095.24,1004.43 2113.2,1004.43 v1(2116.14,1001.49)
NetJ4_3: J4.3 U1.5 | length 1191.3
  Top Layer w10: v1(2071.85,1211.61) 2077.8,1211.61 2096.33,1193.09 U1.5@2166.34,1193.09
  Bottom Layer w10: J4.3 1421.85,1861.61 v1(2071.85,1211.61)
NetJ4_4: J4.4 U1.1 | length 1066.5
  Top Layer w10: v1(2063.98,1343.5) 2066.05,1341.43 2066.05,1321.74 2115.96,1271.83 U1.1
  Bottom Layer w10: J4.4 1521.85,1885.63 v1(2063.98,1343.5)
NetJ4_5: J4.5 U1.7 | length 1168.3
  Top Layer w10: J4.5 1865.87,1785.51 1865.87,1339.84 2051.99,1153.72 U1.7@2166.34,1153.72
NetJ4_6: J4.6 U1.6 | length 1112.8
  Top Layer w10: J4.6 1883.74,1867.64 1883.74,1351.5 2061.83,1173.41 U1.6
NetJ4_7: J4.7 R9.1 U1.3 | length 1647.4
  Top Layer w10: R9.1 1335.25,1646.28 1345.09,1646.28 v1(1627.95,1929.13) ; J4.7 1901.61,1949.76 1901.61,1431.06 2100.22,1232.46 U1.3
  Bottom Layer w10: v1(1627.95,1929.13) 1629.92,1927.16 1719.49,1927.16 J4.7
NetJ4_8: J4.8 R8.1 U1.2 | length 1740.6
  Top Layer w10: R8.1@1252.87,1646.57 1264.68,1646.57 1518.13,1900.02 1551.75,1900.02 v1(1554.13,1897.64) ; J4.8 1919.49,1442.72 2110.06,1252.15 U1.2@2166.34,1252.15
  Bottom Layer w10: v1(1554.13,1897.64) 1555.12,1896.65 1786.61,1896.65 J4.8
NetJ5_1: J5.1 U1.82 | length 1380.2
  Top Layer w10: U1.82 2592.32,1467.32 2950.79,1825.79 3405.16,1825.79 J5.1
NetJ5_2: J5.2 U1.83 | length 1302.2
  Top Layer w10: U1.83 2572.64,1471.26 2943.9,1842.52 3321.89,1842.52 J5.2
NetJ5_3: J5.3 U1.84 | length 1223.2
  Top Layer w10: U1.84 2552.95,1474.21 2937.01,1858.27 3238.62,1858.27 J5.3
NetJ5_4: J5.4 U1.85 | length 1145
  Top Layer w10: U1.85 2533.27,1477.14 2930.14,1874.02 3153.39,1874.02 J5.4
NetJ5_5: J5.5 U1.86 | length 1076
  Top Layer w10: U1.86 2513.58,1484.05 2918.31,1888.78 3078.74,1888.78 3198.48,2008.52 3198.48,2010.01 3210,2021.54 J5.5
NetJ5_6: J5.6 U1.87 | length 992.3
  Top Layer w10: U1.87 2493.9,1489.96 2909.45,1905.51 2983.9,1905.51 J5.6
NetJ5_7: J5.7 U1.88 | length 904.1
  Top Layer w10: U1.88@2474.21,1349.41 2474.21,1495.83 J5.7
NetJ5_8: J5.8 U1.89 | length 883.2
  Top Layer w10: U1.89 2454.53,1573.78 J5.8
NetJ6_1: J6.1 U1.90 | length 833.7
  Top Layer w10: U1.90 2434.84,1700.47 2749.92,2015.55 J6.1 J6.1@2768.09,2033.72
NetJ6_2: J6.2 U1.91 | length 796
  Top Layer w10: U1.91 2415.16,1780.79 J6.2
NetJ6_3: J6.3 U1.92 | length 750.5
  Top Layer w10: U1.92@2395.47,1349.41 2395.47,1860.12 J6.3
NetJ6_4: J6.4 U1.93 | length 729.1
  Top Layer w10: U1.93 2375.79,1941.42 2464.02,2029.65 J6.4@2465,2029.65
NetJ6_5: J6.5 U1.94 | length 696.2
  Top Layer w10: U1.94 2356.1,2012.64 2365,2021.54 J6.5@2365,2030.63
NetJ6_6: J6.6 U1.95 | length 723.1
  Top Layer w10: J6.6 2336.42,1960.2 U1.95
NetJ6_7: J6.7 U1.96 | length 745.1
  Top Layer w10: J6.7 2316.73,1879.88 U1.96@2316.73,1349.41
NetJ6_8: J6.8 U1.97 | length 812.3
  Top Layer w10: J6.8 2297.05,1801.93 U1.97 ; U1.97@2296.73,1314.43 U1.97@2296.73,1338.09
NetJ7_1: J7.1 S4.3 S4.4 | length 918.7
  Top Layer w20: S4.3 S4.4 1589.57,432.68 J7.1
NetJ8_1: J8.1 U1.19 | length 2293.1
  Top Layer w10: U1.19@2166.34,917.5 2166.65,917.81 2217.76,917.81 2280.97,981.03 2306.81,981.03 v1(2311.02,985.24) ; v1(2773.62,186.02) 2774.61,185.04 3764.37,185.04 J8.1
  Bottom Layer w10: v1(2311.02,985.24) 2412.4,883.86 2412.4,706.54 2773.62,345.32 v1(2773.62,186.02)
NetJ8_5: J8.5 U1.35 | length 1662.1
  Top Layer w10: U1.35@2415.16,729.33 2415.16,609.45 2594.49,430.12 3808.46,430.12 J8.5
NetJ8_6: J8.6 U1.36 | length 1534.9
  Top Layer w10: U1.36 2434.84,615.35 2600.39,449.8 3729.13,449.8 J8.6
NetJ8_7: J8.7 U1.37 | length 1592.5
  Top Layer w10: U1.37 2454.53,624.21 2557.72,521.02 3800.35,521.02 J8.7
NetJ8_8: J8.8 U1.38 | length 1438.6
  Top Layer w10: U1.38@2474.21,729.33 2474.21,637.99 2573.31,538.9 3705.36,538.9 3743.57,577.1 3756.43,577.1 J8.8
NetJ8_9: J8.9 U1.39 | length 1553.8
  Top Layer w10: U1.39 2493.9,644.88 2582.01,556.77 3682.7,556.77 3768.65,642.72 3823.03,642.72 J8.9
NetJ8_10: J8.10 U1.40 | length 1402.4
  Top Layer w10: U1.40@2513.58,729.33 2513.58,652.76 2591.69,574.65 3653.98,574.65 J8.10
NetJ8_11: J8.11 U1.41 | length 1518.2
  Top Layer w10: U1.41 2533.27,658.66 2599.41,592.52 3612.2,592.52 3749.02,729.33 3800.2,729.33 3843.66,772.79 3844.95,772.79 3855.03,782.87 J8.11
NetJ8_12: J8.12 U1.42 | length 1378.5
  Top Layer w10: U1.42 2552.95,664.57 2606.3,611.22 3590.55,611.22 J8.12
NetJ8_13: J8.13 U1.51 | length 1111.4
  Top Layer w10: U1.51@2786.42,799.39 3715.73,799.39 3754.92,838.58 3818.9,838.58 J8.13
NetJ8_14: J8.14 U1.52 | length 1013.5
  Top Layer w10: U1.52 3698.41,819.07 J8.14
NetJ8_15: J8.15 U1.70 | length 1205.4
  Top Layer w10: U1.70 2901.75,1173.41 v1(2946.85,1218.5)
  Bottom Layer w10: v1(2946.85,1218.5) 3615.16,1218.5 3853.15,980.51 J8.15
NetJ8_16: J8.16 U1.50 | length 1502.9
  Top Layer w10: U1.50@2710.43,729.33 2710.53,729.43 2710.53,977.26 v1(2710.63,977.36)
  Bottom Layer w10: v1(2710.63,977.36) 2710.63,1038.39 2853.35,1181.1 3561.61,1181.1 J8.16
NetL1_1: L1.1 X2.5 X2.6 Z1.1 Z2.1 | length 1242
  Top Layer w10: L1.1 447.34,1270.75 434.63,1283.46 X2.6 X2.5 156.1,1747.05 459.65,1747.05 483.27,1723.42 Z1.1@589.57,1723.42
NetR2_2: R2.2 U1.34 | length 275.8
  Top Layer w10: U1.34 2395.47,554.33 2451.77,498.03 R2.2
NetR8_2: R8.2 U4.8 | length 312.3
  Top Layer w10: 1003.94,1434.05 1093.5,1434.05 R8.2@1227.44,1567.99 ; R8.2@1236.26,1576.81 R8.2@1227.44,1567.99 ; R8.2 1237.28,1567.99 R8.2@1227.44,1567.99
NetR9_2: R9.2 U4.9 | length 361
  Top Layer w10: 1023.62,1414.37 U4.9 1157.48,1414.37 1310.12,1567.01 1310.12,1567.99 R9.2@1317.42,1575.29
NetR12_1: R12.1 X2.2 Z1.2 | length 508
  Top Layer w10: X2.2 452.36,1689.96 556.1,1689.96 584.65,1661.42 Z1.2 ; Z1.2@595.47,1658.46 645.67,1608.27 645.67,1510.75 653.46,1502.95 R12.1@662.4,1502.95
NetR12_2: R12.2 U4.30 | length 184.6
  Top Layer w10: 684.5,1431.64 741.14,1375 U4.30
NetR13_1: R13.1 X2.3 Z2.2 | length 521
  Top Layer w10: X2.3 296.46,1524.61 347.44,1524.61 483.27,1660.43 Z2.2@491.14,1660.43 ; Z2.2 497.65,1649.98 513.4,1649.98 560.6,1602.78 560.6,1510.75 564.18,1507.17 R13.1@577.47,1507.17
NetR13_2: R13.2 U4.29 | length 294.7
  Top Layer w10: R13.2@588.3,1441.23 588.3,1438.27 594.41,1432.16 597.36,1432.16 674.21,1355.31 U4.29
NetR15_2: R15.2 U4.1 | length 144.1
  Top Layer w10: 866.14,1434.05 U4.1 866.14,1576.77 R15.2
NetT2_2: T2.2 U6.1 | length 106
  Top Layer w10: U6.1 815.16,956.89 T2.2
USBVCC: C18.1 F1.2 T2.1 U4.31 | length 953.9
  Top Layer w10: C18.1@763.78,1471.46 C18.1@766.81,1471.46 ; C18.1@781.57,1471.46 788.39,1464.65 788.39,1434.06 827.76,1394.68 U4.31
  Top Layer w20: C18.1@763.78,1471.46 F1.2 504.76,1468.66 504.76,1431.26 813.98,1122.05 813.98,1054.96 823.66,1045.28 T2.1 ; C18.1@766.81,1471.46 C18.1 C18.1@778.54,1471.46
VIN: C2.2 D1.2 J7.6 PC1.1 R17.2 U2.3 U3.3 | length 2780.7
  Top Layer w20: R17.2 82.52,969.65 94.33,969.65 194.88,869.09 U2.3 467.17,861.57 498.66,861.57 594.49,765.75 C2.2 594.49,433.86 589.76,429.13 701.77,429.13 ; PC1.1 PC1.1@841.54,407.22 ; U3.3@1052.95,762.79 1052.95,545.47 1051.14,543.66 1051.14,521.61 967.36,437.83 863.03,437.83 841.54,416.34 828.74,429.13 701.77,429.13 ; J7.6 774.61,72.83 701.77,145.67 701.77,429.13
pads on no net: T2. U1.4 U1.8 U1.9 U1.14 U1.27 U1.28 U1.29 U1.47 U1.48 U1.49 U1.65 U1.66 U1.67 U1.68 U1.69 U1.79 U3.4 U4.5 U4.6 U4.7 U4.12 U4.14 U4.18 U4.19 U4.20 U4.21 U4.22 U4.23 U4.25 U4.26 U6.4 U6.5 U6.6 U6.7 U6.8

## Polygon pours and split planes (outlines as drawn)
+5V on Top Layer "+5V_L01_P000" (solid, pour order 0): 0,0 0,2102.36 3833.66,2102.36 3932.09,2003.94 3932.09,1496.06 3993.11,1435.04 3993.11,232.28 3897.64,136.81 3897.64,0
GND on Bottom Layer "GND_L02_P001" (solid, pour order 1): 0,0 0,2102.36 3833.66,2102.36 3932.09,2003.94 3932.09,1496.06 3993.11,1435.04 3993.11,232.28 3897.64,136.81 3897.64,0

## Keep-outs
Keep-Out Layer:
  circle w10: c3811.02,2008.86 r78.74
  circle w10: c3811.02,88.58 r78.74
  circle w10: c78.74,2023.62 r78.74
  lines w10: 157.41,75.39 cw(c78.74,78.74) 157.48,78.74

## Silkscreen, mask and mechanical layers (free items; w line width, h text height)
Top Overlay:
  lines w10: 0,189 0,0 3897.64,0 3897.64,136.81 3993.11,232.28 3993.11,1435.04 3932.09,1496.06 3932.09,2009.84 3839.57,2102.36 0,2102.36 ; 0,638 0,1196 ; 157.48,2102.36 0,2102.36 ; 0,1845 0,1845 ; 0,1845 0,2102.36
Mechanical 1:
  lines w47.24: -23.62,10.74 ccw(c0,10.64) -16.7,-6.06 ; -23.62,10.74 -18.65,2090.65 ; -23.62,10.74 -23.62,10.7 ccw(c0,10.64) -16.7,-6.06 ; -18.65,2090.65 cw(c4.98,2090.63) 4.98,2114.25 ; -18.65,2090.65 -18.65,2090.69 cw(c4.98,2090.63) 4.98,2114.25 ; -16.69,-6.07 ccw(c0.01,10.63) 0.03,-12.99 ; -16.7,-6.07 ccw(c0.01,10.63) -16.69,-6.07 ; -16.7,-6.06 ccw(c0.01,10.63) -16.7,-6.07 ; -16.69,-6.07 ccw(c0.01,10.63) 0.03,-12.99 ; -16.7,-6.07 ccw(c0,10.64) -16.69,-6.07 ; -16.7,-6.06 ccw(c0,10.64) -16.7,-6.07 ; -16.7,-6.06 -16.69,-6.07 ; 0.03,-12.99 3889.99,-10.5 ; 4.98,2114.25 3829.98,2114.25 ; 3829.98,2114.25 cw(c3829.98,2090.63) 3846.68,2107.33 ; 3829.98,2114.25 cw(c3829.98,2090.63) 3846.68,2107.33 ; 3846.68,2107.33 3925.39,2028.62 ; 3866.35,130.63 cw(c3889.98,130.63) 3873.27,147.33 ; 3866.35,130.63 cw(c3889.98,130.63) 3873.27,147.33 ; 3866.35,130.63 3866.35,36.73 23.68,34.27 28.54,2067.01 3820.19,2067.01 3896.35,1990.84 3896.35,1510.63 ; 3873.27,147.33 3971.35,245.41 3971.35,1425.84 3903.27,1493.93 ; 3889.99,-10.5 ccw(c3889.98,13.12) 3890.45,-10.5 ; 3889.99,-10.5 ccw(c3889.98,13.12) 3890.42,-10.5 3890.45,-10.5 ; 3890.45,-10.5 3895.33,-10.41 ; 3895.37,-10.41 ccw(c3894.93,13.21) 3918.55,13.21 ; 3895.33,-10.41 ccw(c3894.93,13.21) 3918.55,13.21 ; 3895.33,-10.41 3895.37,-10.41 ; 3896.35,1510.63 ccw(c3919.98,1510.63) 3903.27,1493.93 ; 3896.35,1510.63 ccw(c3919.98,1510.63) 3903.27,1493.93 ; 3913.6,27.69 cw(c3894.93,13.21) 3918.55,13.21 ; 3913.6,27.69 cw(c3894.93,13.21) 3918.55,13.21 ; 3913.6,27.69 3913.6,120.84 4011.68,218.93 ; 3925.39,2028.62 cw(c3919.98,2005.63) 3943.6,2005.63 ; 3925.39,2028.62 cw(c3919.98,2005.63) 3943.6,2005.63 ; 3943.6,2005.63 3943.6,1520.41 4011.68,1452.33 ; 4011.68,218.93 ccw(c3994.98,235.63) 4018.6,235.63 ; 4011.68,218.93 ccw(c3994.98,235.63) 4018.6,235.63 ; 4011.68,1452.33 cw(c3994.98,1435.63) 4018.6,1435.63 ; 4011.68,1452.33 cw(c3994.98,1435.63) 4018.6,1435.63 ; 4018.6,235.63 4018.6,1435.63